# Altium PCB Sensor.PcbDoc
Units mil, origin at the board's own origin, x right, y up, seen from the top; angles counter-clockwise.
Board outline 6000 x 4000 mil, 2 copper layers (Top Layer, Bottom Layer); 25 components, 14 nets, 58 pads, 0 vias.
Unrouted connection lines stored in the file: 2.
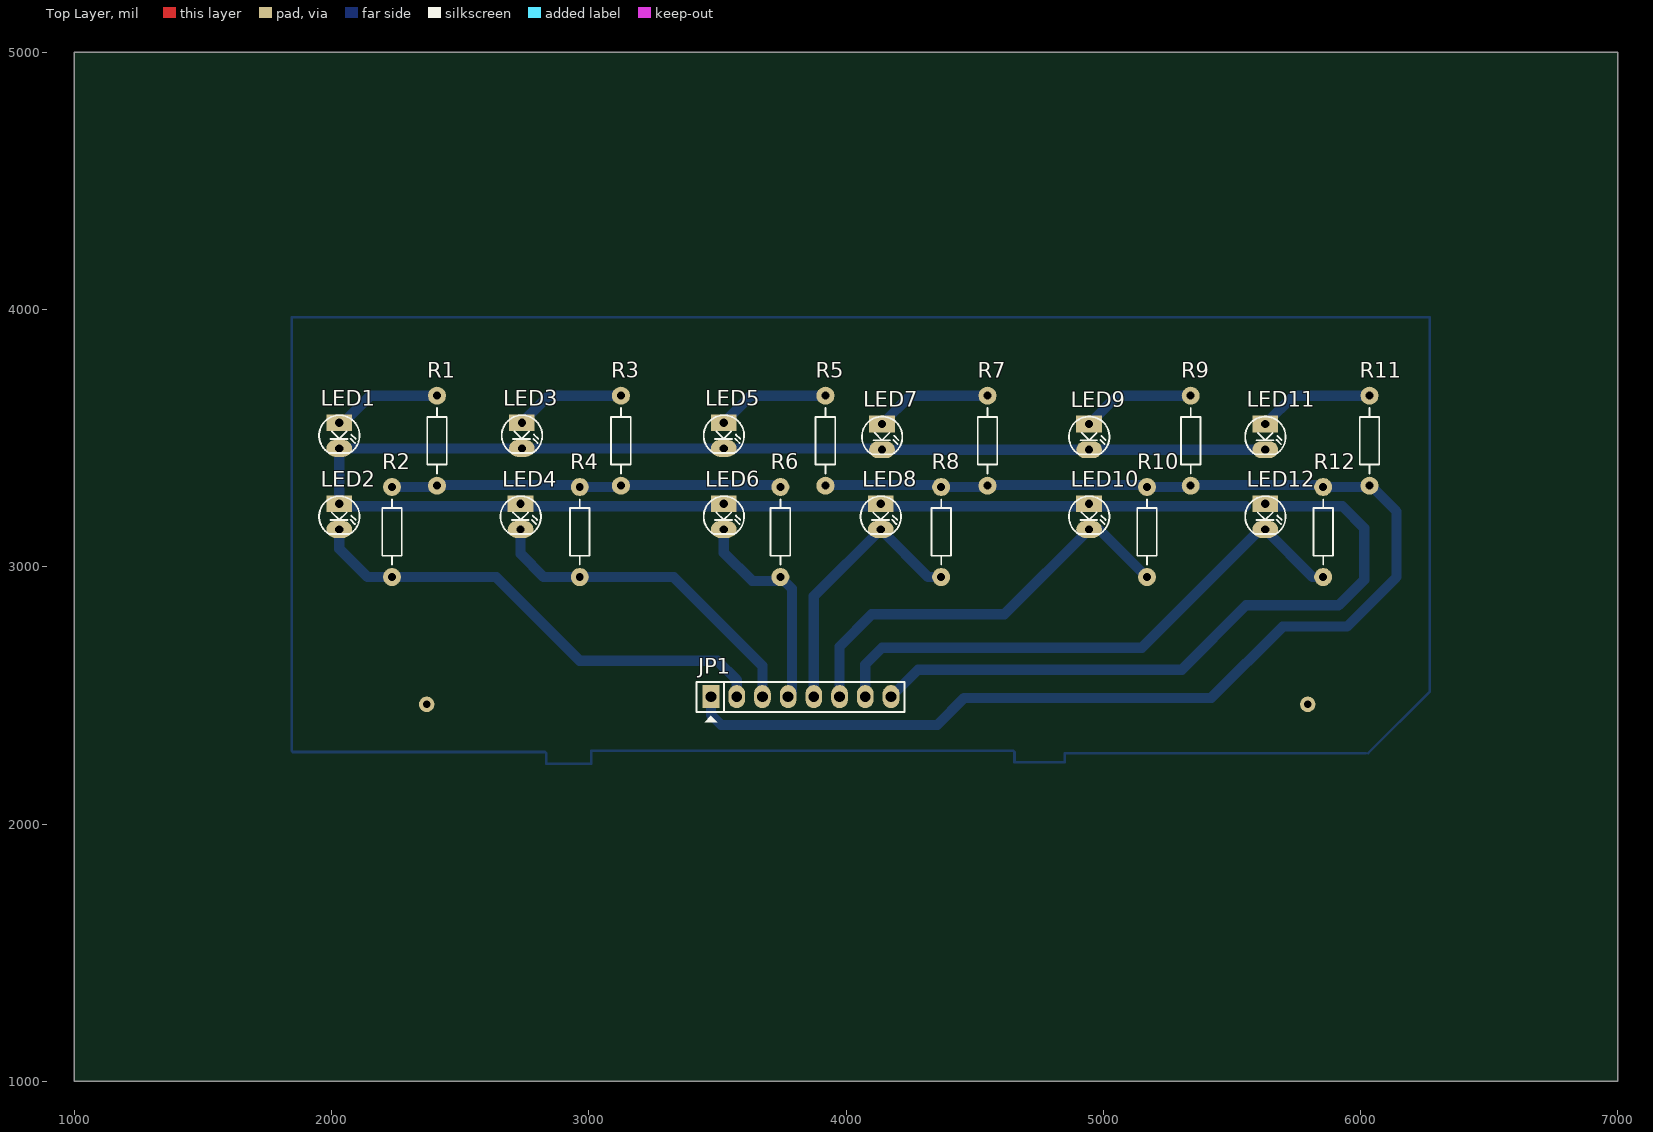
[diagram p0: Top Layer view]
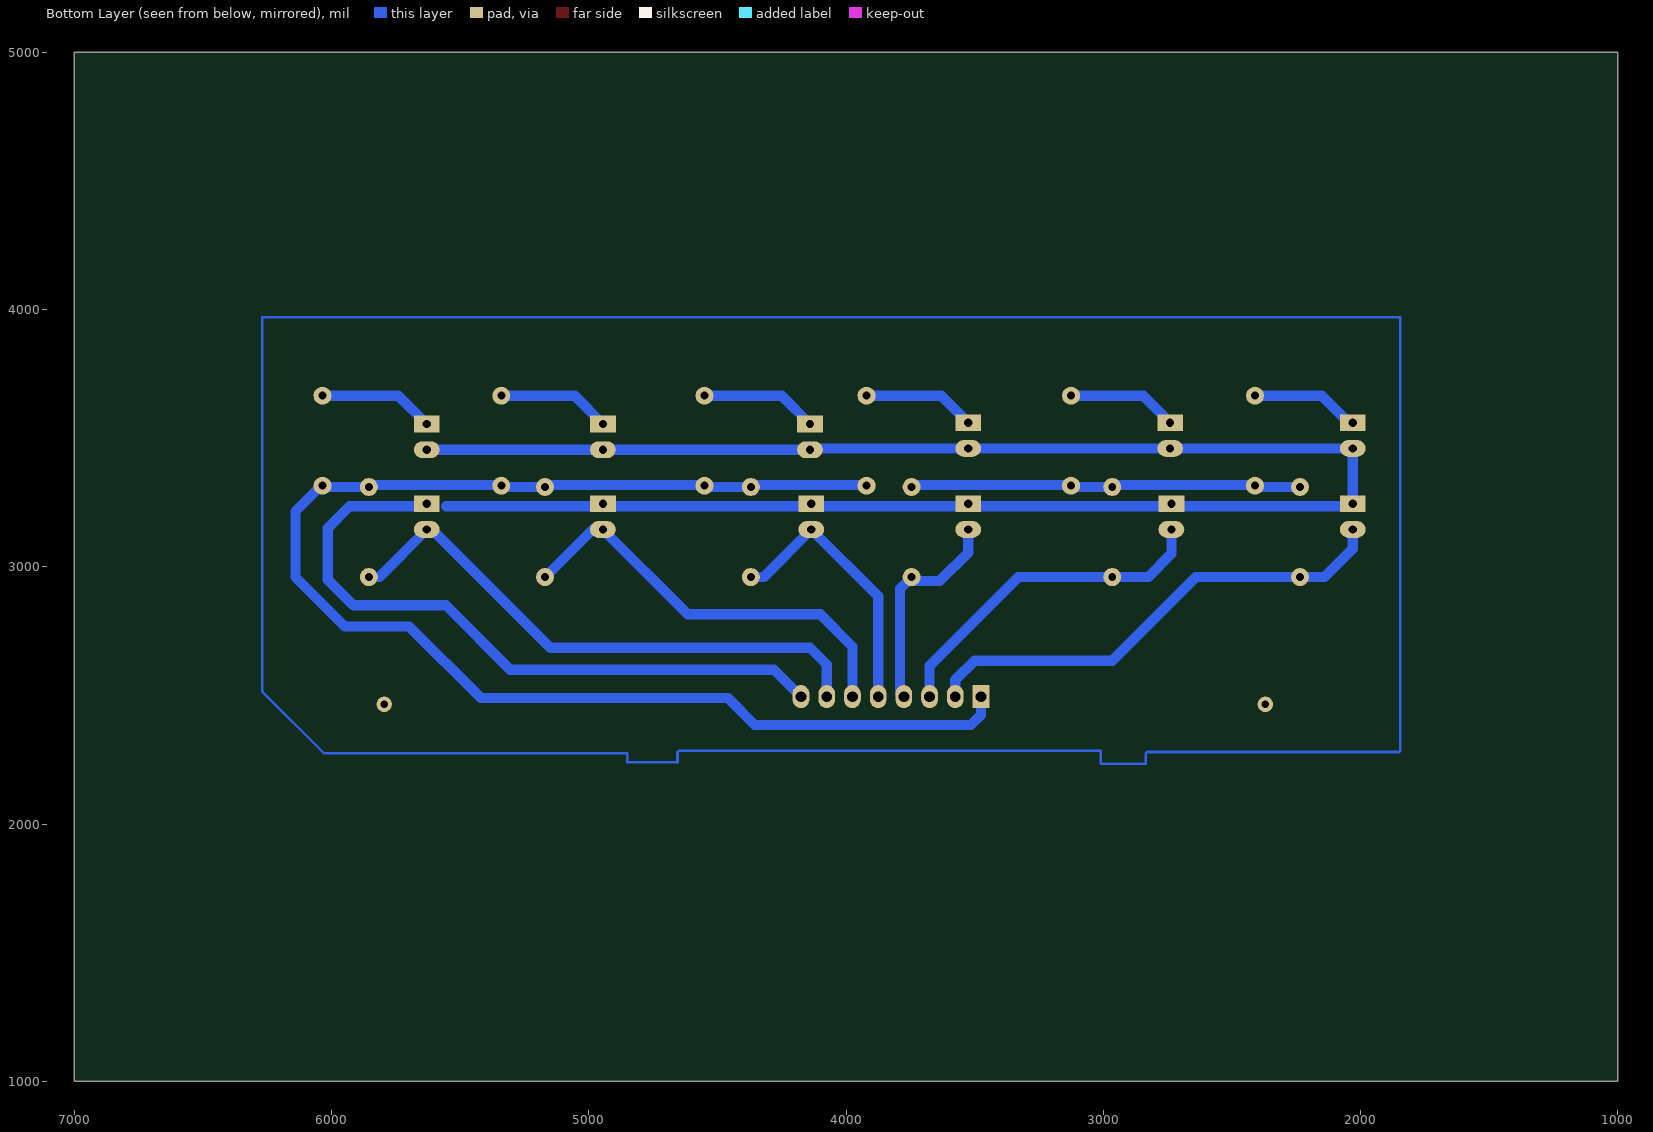
[diagram p1: Bottom Layer view, seen from below]
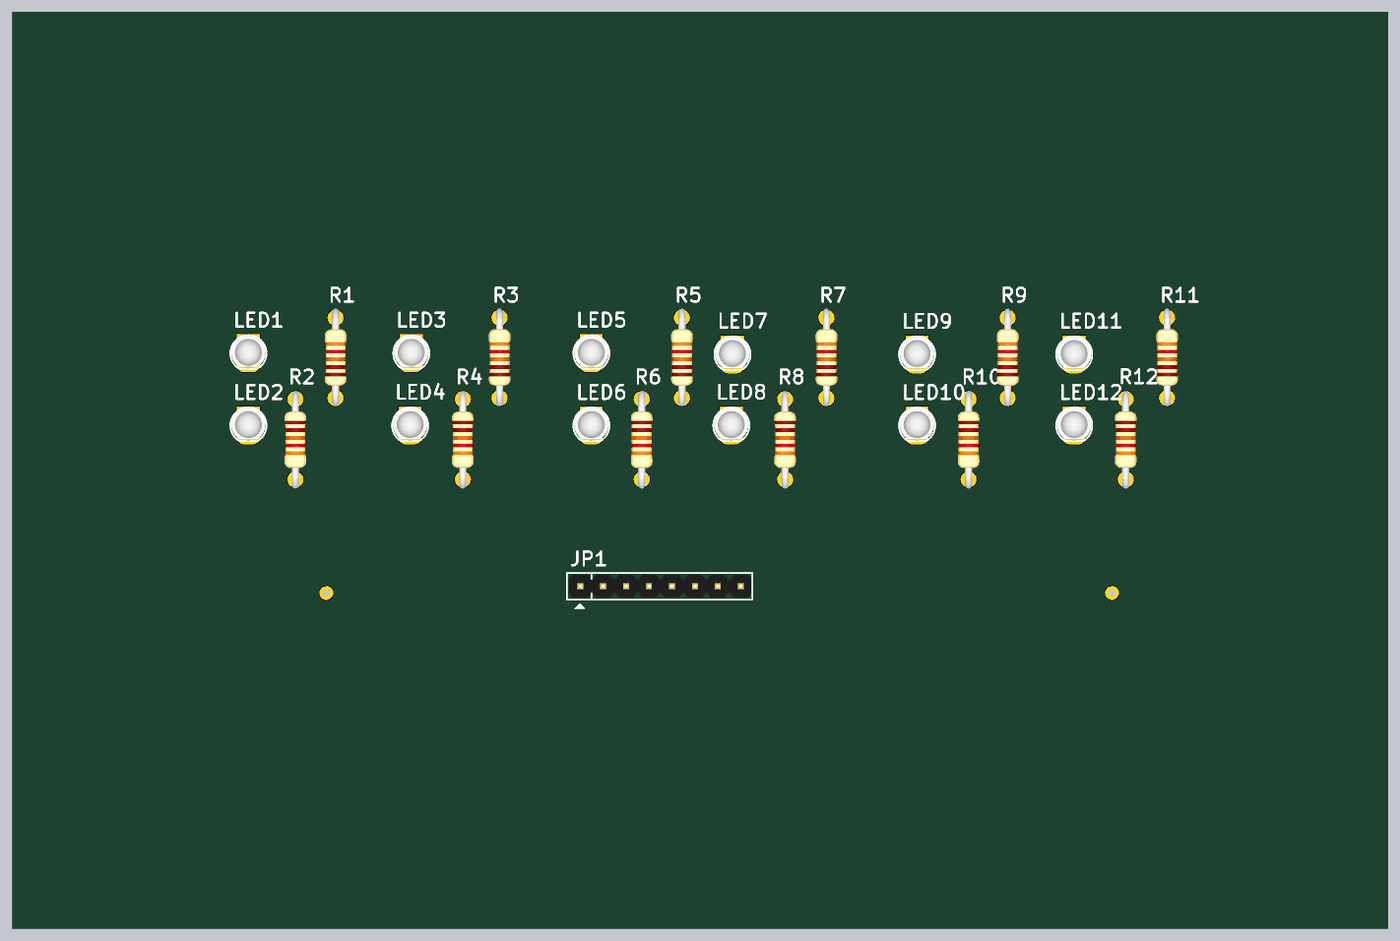
[diagram p2: 3D render of the assembled board from above, using the file's embedded part models]

## Layer stack, top to bottom
Top Solder: solder mask 0.4, Solder Resist, Dk 3.5
Top Layer: signal copper 1.4
Dielectric 1: dielectric 12.6, FR-4, Dk 4.8
Bottom Layer: signal copper 1.4
Bottom Solder: solder mask 0.4, Solder Resist, Dk 3.5

## Board outline
1000,1000 7000,1000 7000,5000 1000,5000

## Design rules (kind name [scope] priority, off if disabled: settings)
Clearance [All] p1: gap=20
PlaneConnect [All] p1: planeconnectstyle=Relief reliefexpansion=20 reliefentries=4 reliefconductorwidth=20 reliefairgap=10
PolygonConnect [All] p1: connectstyle=Relief reliefconductorwidth=20 reliefentries=4 polygonreliefangle="90 Angle" airgapwidth=10
RoomDefinition Sheet1 [InComponentClass('Sheet1')] p1: confinementstyle=ConfineIn formatcopy=TRUE lockcomponents=FALSE outline 7045,1055 12960,1055 12960,1985 7045,1985
RoutingVias [All] p1: holewidth=35 width=65 viastyle="Through Hole" minholewidth=35 minwidth=65 maxholewidth=35 maxwidth=65
SolderMaskExpansion [All] p1: expansion=4
Width [All] p1: maxlimit=65 minlimit=25 preferedwidth=40
29 further rules are at their usual default settings.

## Components (designator, comment, footprint, x,y, rotation, side; value= is the part's Value field where it differs from the comment)
JP1 "JP8 PIN" JP8 3475,2495 r0 top
LED1 "LED" LED-3 2030,3560 r270 top
LED2 "LED" LED-3 2030,3245 r270 top
LED3 "LED" LED-3 2740,3560 r270 top
LED4 "LED" LED-3 2735,3245 r270 top
LED5 "LED" LED-3 3525,3560 r270 top
LED6 "LED" LED-3 3525,3245 r270 top
LED7 "LED" LED-3 4140,3555 r270 top
LED8 "LED" LED-3 4135,3245 r270 top
LED9 "LED" LED-3 4945,3555 r270 top
LED10 "LED" LED-3 4945,3245 r270 top
LED11 "LED" LED-3 5630,3555 r270 top
LED12 "LED" LED-3 5630,3245 r270 top
R1 "1k" R1/4W 2410,3665 r270 top
R2 "1k" R1/4W 2235,2960 r90 top
R3 "1k" R1/4W 3125,3665 r270 top
R4 "1k" R1/4W 2965,2960 r90 top
R5 "1k" R1/4W 3920,3665 r270 top
R6 "1k" R1/4W 3745,2960 r90 top
R7 "1k" R1/4W 4550,3665 r270 top
R8 "1k" R1/4W 4370,2960 r90 top
R9 "1k" R1/4W 5340,3665 r270 top
R10 "1k" R1/4W 5170,2960 r90 top
R11 "1k" R1/4W 6035,3665 r270 top
R12 "1k" R1/4W 5855,2960 r90 top

## Footprints (in the part's own frame and the unit in brackets; to place one, negate y for a bottom-side part, rotate by r counter-clockwise, add the part's x,y. Pads: shape width x height; smd on the part's side, far side on the other; paste and mask are expansions set on the pad)
JP8 [mil] "JP8"
  rect 65x90 hole 42: 1(0,0)
  oval 65x90 hole 42: 2(100,0) 3(200,0) 4(300,0) 5(400,0) 6(500,0) 7(600,0) 8(700,0)
  silkscreen extent -56,-100 752,57, body extent -48,-50 748,48, height 323
LED-3 [mil] "LED 2 PIN, 3ly Only colour"
  rect 65x100 hole 32: 1(0,0)
  oval 65x100 hole 32: 2(100,0)
  silkscreen extent -29,-78 118,79, body extent -29,-75 109,75, height 256
R1/4W [mil] "R 1/4W, 2 Pin, 350mil"
  round 70 hole 31: 1(0,0) 2(350,0)
  silkscreen extent 48,-38 302,38, body extent -40,-47 386,47, height 111

## Part data
JP1: library part JP8
LED1 LED2 LED3 LED4 LED5 LED6 LED7 LED8 LED9 LED10 LED11 LED12: "LED Single colour Green and Red"
R1 R2 R3 R4 R5 R6 R7 R8 R9 R10 R11 R12: library part R1/4W, "Resistor 1/4W"

## Free pads (board coordinates)
  round 60 hole 30: 2(5795,2465) 3(2370,2465)

## Nets (pads, with @x,y where several pads share a name; then routed paths per layer and width w, separated by ;. In a path a pad name is that pad's centre, name@x,y a point inside that pad or via, vN(x,y) a via of type N, cw(c..) or ccw(c..) an arc to the next point about the centre after c; other vN are vias at no path point)
GND: JP1.8 LED1.2 LED2.1 LED3.2 LED4.1 LED5.2 LED6.1 LED7.2 LED8.1 LED9.2 LED10.1 LED11.2 LED12.1 | length 10086.5
  Bottom Layer w40: LED2.1@2015,3235 2725,3235 LED4.1 2735,3235 3515,3235 LED6.1 3525,3235 4125,3235 LED8.1 4135,3235 4935,3235 LED10.1 4945,3235 5555,3235 ; LED2.1 LED1.2 LED3.2 LED5.2 4135,3460 LED7.2 LED9.2 LED11.2 ; JP1.8 4280,2600 5305,2600 5555,2850 5915,2850 6015,2950 6015,3150 5930,3235 5630,3235 LED12.1 LED12.1@5620,3235
NetLED1_1: LED1.1 R1.1 | length 423.5
  Bottom Layer w40: LED1.1 2045,3560 2150,3665 R1.1
NetLED3_1: LED3.1 R3.1 | length 428.5
  Bottom Layer w40: LED3.1 2845,3665 R3.1
NetLED5_1: LED5.1 R5.1 | length 438.5
  Bottom Layer w40: LED5.1 3630,3665 R5.1
NetLED7_1: LED7.1 R7.1 | length 455.6
  Bottom Layer w40: LED7.1 4250,3665 R7.1
NetLED9_1: LED9.1 R9.1 | length 440.6
  Bottom Layer w40: LED9.1 5055,3665 R9.1
NetLED11_1: LED11.1 R11.1 | length 450.6
  Bottom Layer w40: LED11.1 5740,3665 R11.1
OUT1: JP1.2 LED2.2 R2.1 | length 1896.2
  Bottom Layer w40: LED2.2 2030,3070 2140,2960 R2.1 2640,2960 2965,2635 3500,2635 3575,2560 JP1.2
OUT2: JP1.3 LED4.2 R4.1 | length 1335.2
  Bottom Layer w40: LED4.2 2735,3050 2825,2960 R4.1 3330,2960 3675,2615 JP1.3
OUT3: JP1.4 LED6.2 R6.1 | length 851.6
  Bottom Layer w40: LED6.2 3525,3055 3635,2945 3730,2945 R6.1 3790,2915 3790,2510 JP1.4
OUT4: JP1.5 LED8.2 R8.1 | length 1069.3
  Bottom Layer w40: JP1.5 3875,2885 LED8.2 4320,2960 R8.1
OUT5: JP1.6 LED10.2 R10.1 | length 1655.1
  Bottom Layer w40: JP1.6 3975,2690 4100,2815 4615,2815 LED10.2 4985,3145 R10.1
OUT6: JP1.7 LED12.2 R12.1 | length 2208.2
  Bottom Layer w40: JP1.7 4075,2620 4140,2685 5150,2685 LED12.2@5620,3155 ; LED12.2@5615,3145 LED12.2 5815,2960 R12.1
VCC: JP1.1 R1.2 R2.2 R3.2 R4.2 R5.2 R6.2 R7.2 R8.2 R9.2 R10.2 R11.2 R12.2 | length 7056
  Bottom Layer w40: R2.2 2405,3310 R1.2 2412.5,3317.5 2957.5,3317.5 R4.2 3120,3310 R3.2 3125,3317.5 3737.5,3317.5 R6.2 ; JP1.1 3475,2425 3515,2385 4355,2385 4460,2490 5420,2490 5697.5,2767.5 5947.5,2767.5 6140,2960 6140,3215 6045,3310 R11.2@6030,3310 ; R5.2 3920,3317.5 4362.5,3317.5 R8.2 4545,3310 R7.2 4550,3317.5 5162.5,3317.5 R10.2 5335,3310 R9.2 5340,3317.5 5847.5,3317.5 R12.2 R11.2@6030,3310 ; R11.2 R11.2@6030,3310
copper on no net: | length 12270.6
  Bottom Layer w10: 5765,3970 5790,3970 ; 6020,2275 5395,2275 5160,2275 4850,2275 4850,2240 4655,2240 4655,2280 4650,2285 3010,2285 3010,2235 2835,2235 2835,2275 2830,2280 2710,2280 1850,2280 1845,2285 1845,3970 6265,3970 ; 6030,2275 6270,2515 6270,3970